# Altium PCB ECUs Simulator.PcbDoc
Units mil, origin at the board's own origin, x right, y up, seen from the top; angles counter-clockwise.
Board outline 2945 x 3010 mil, 2 copper layers (Top Layer, Bottom Layer), stack 12.8 mil thick; 61 components, 38 nets, 253 pads, 148 vias.
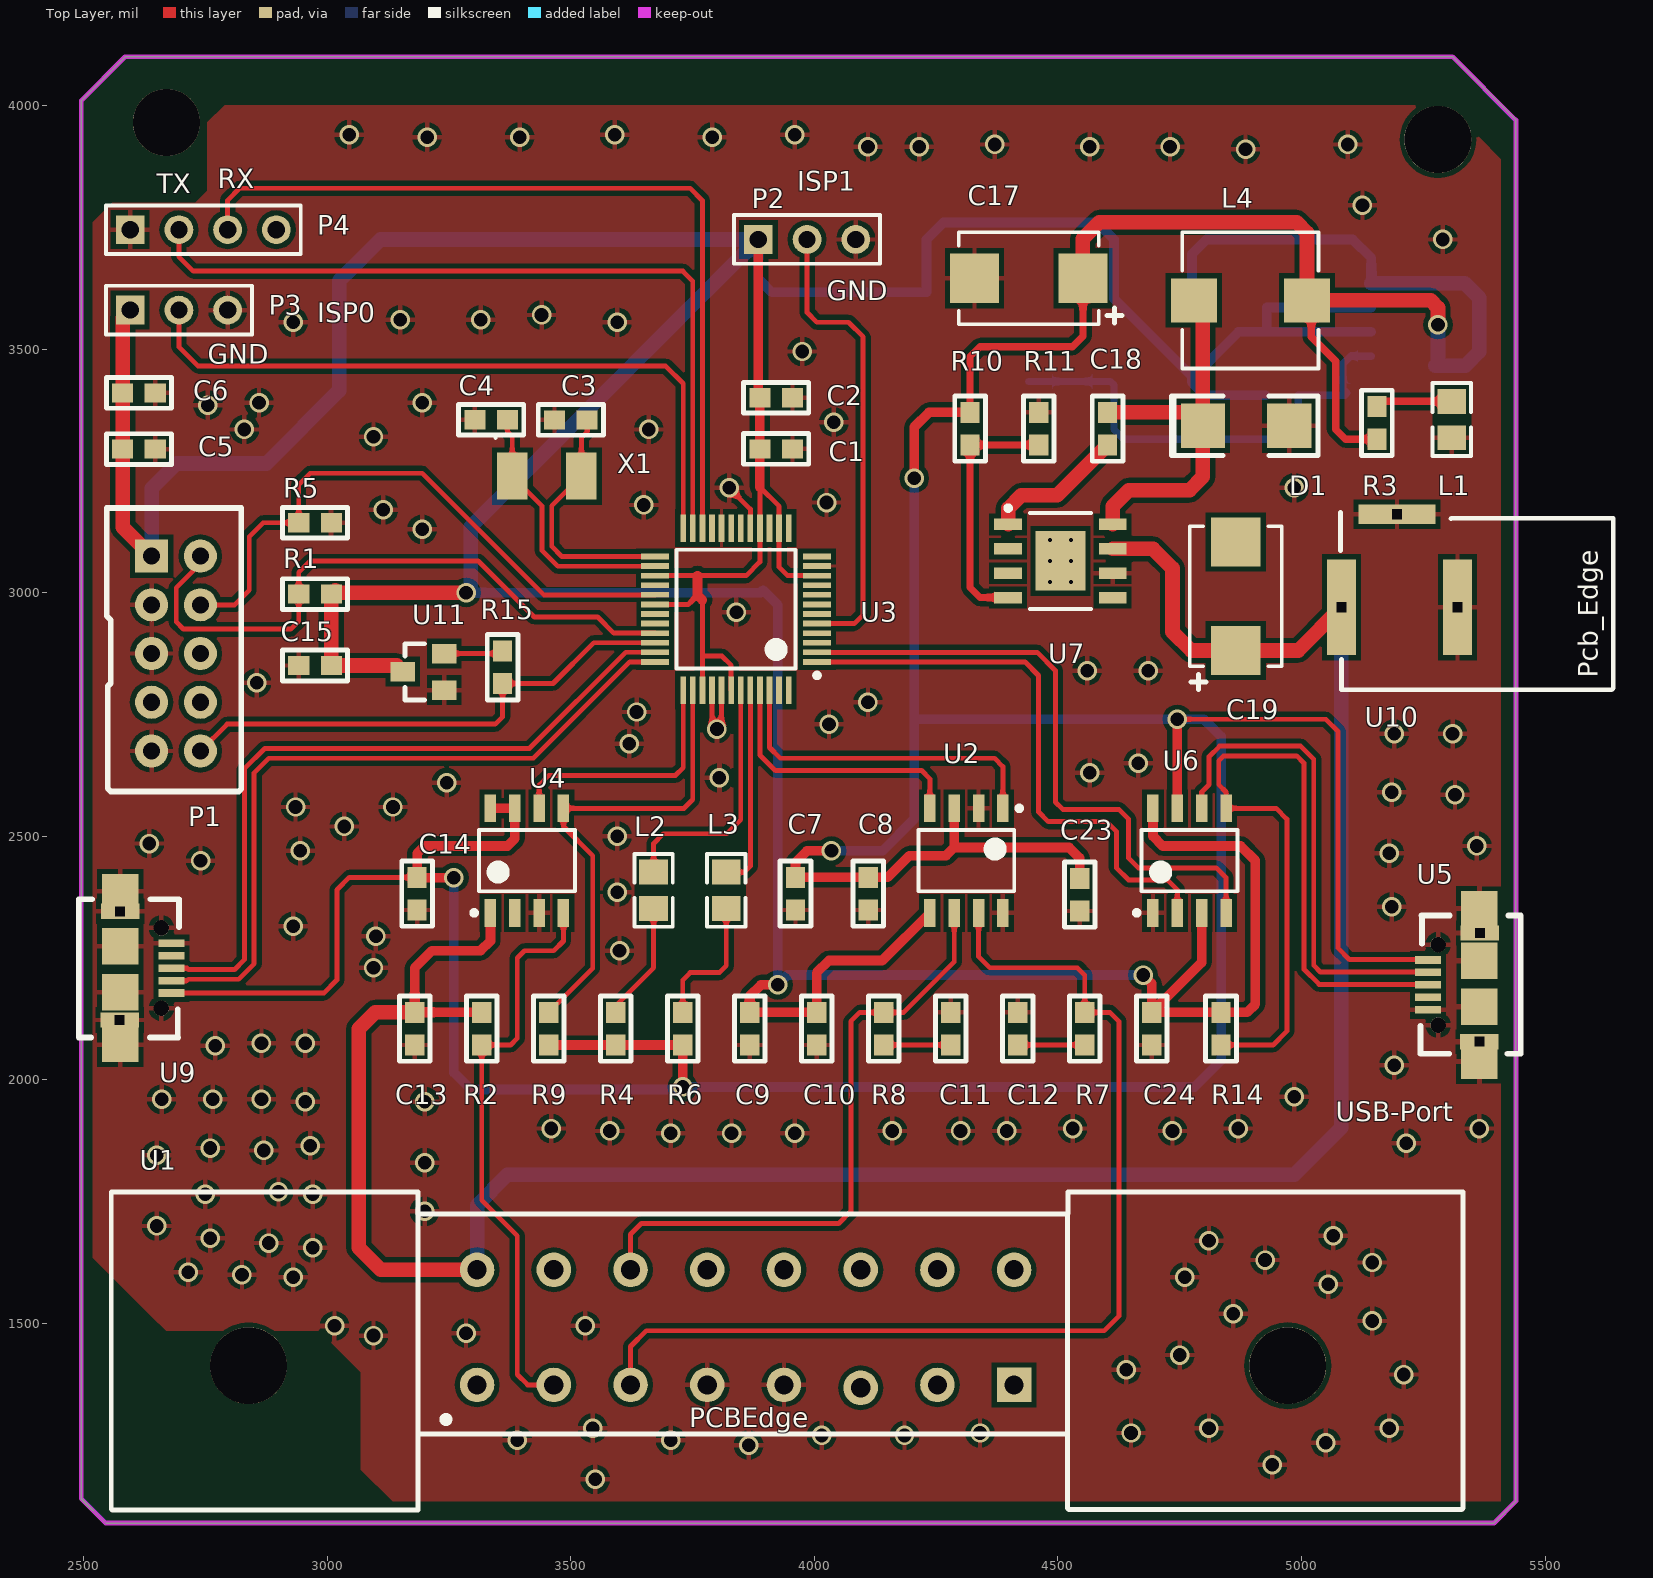
[diagram p0: Top Layer view]
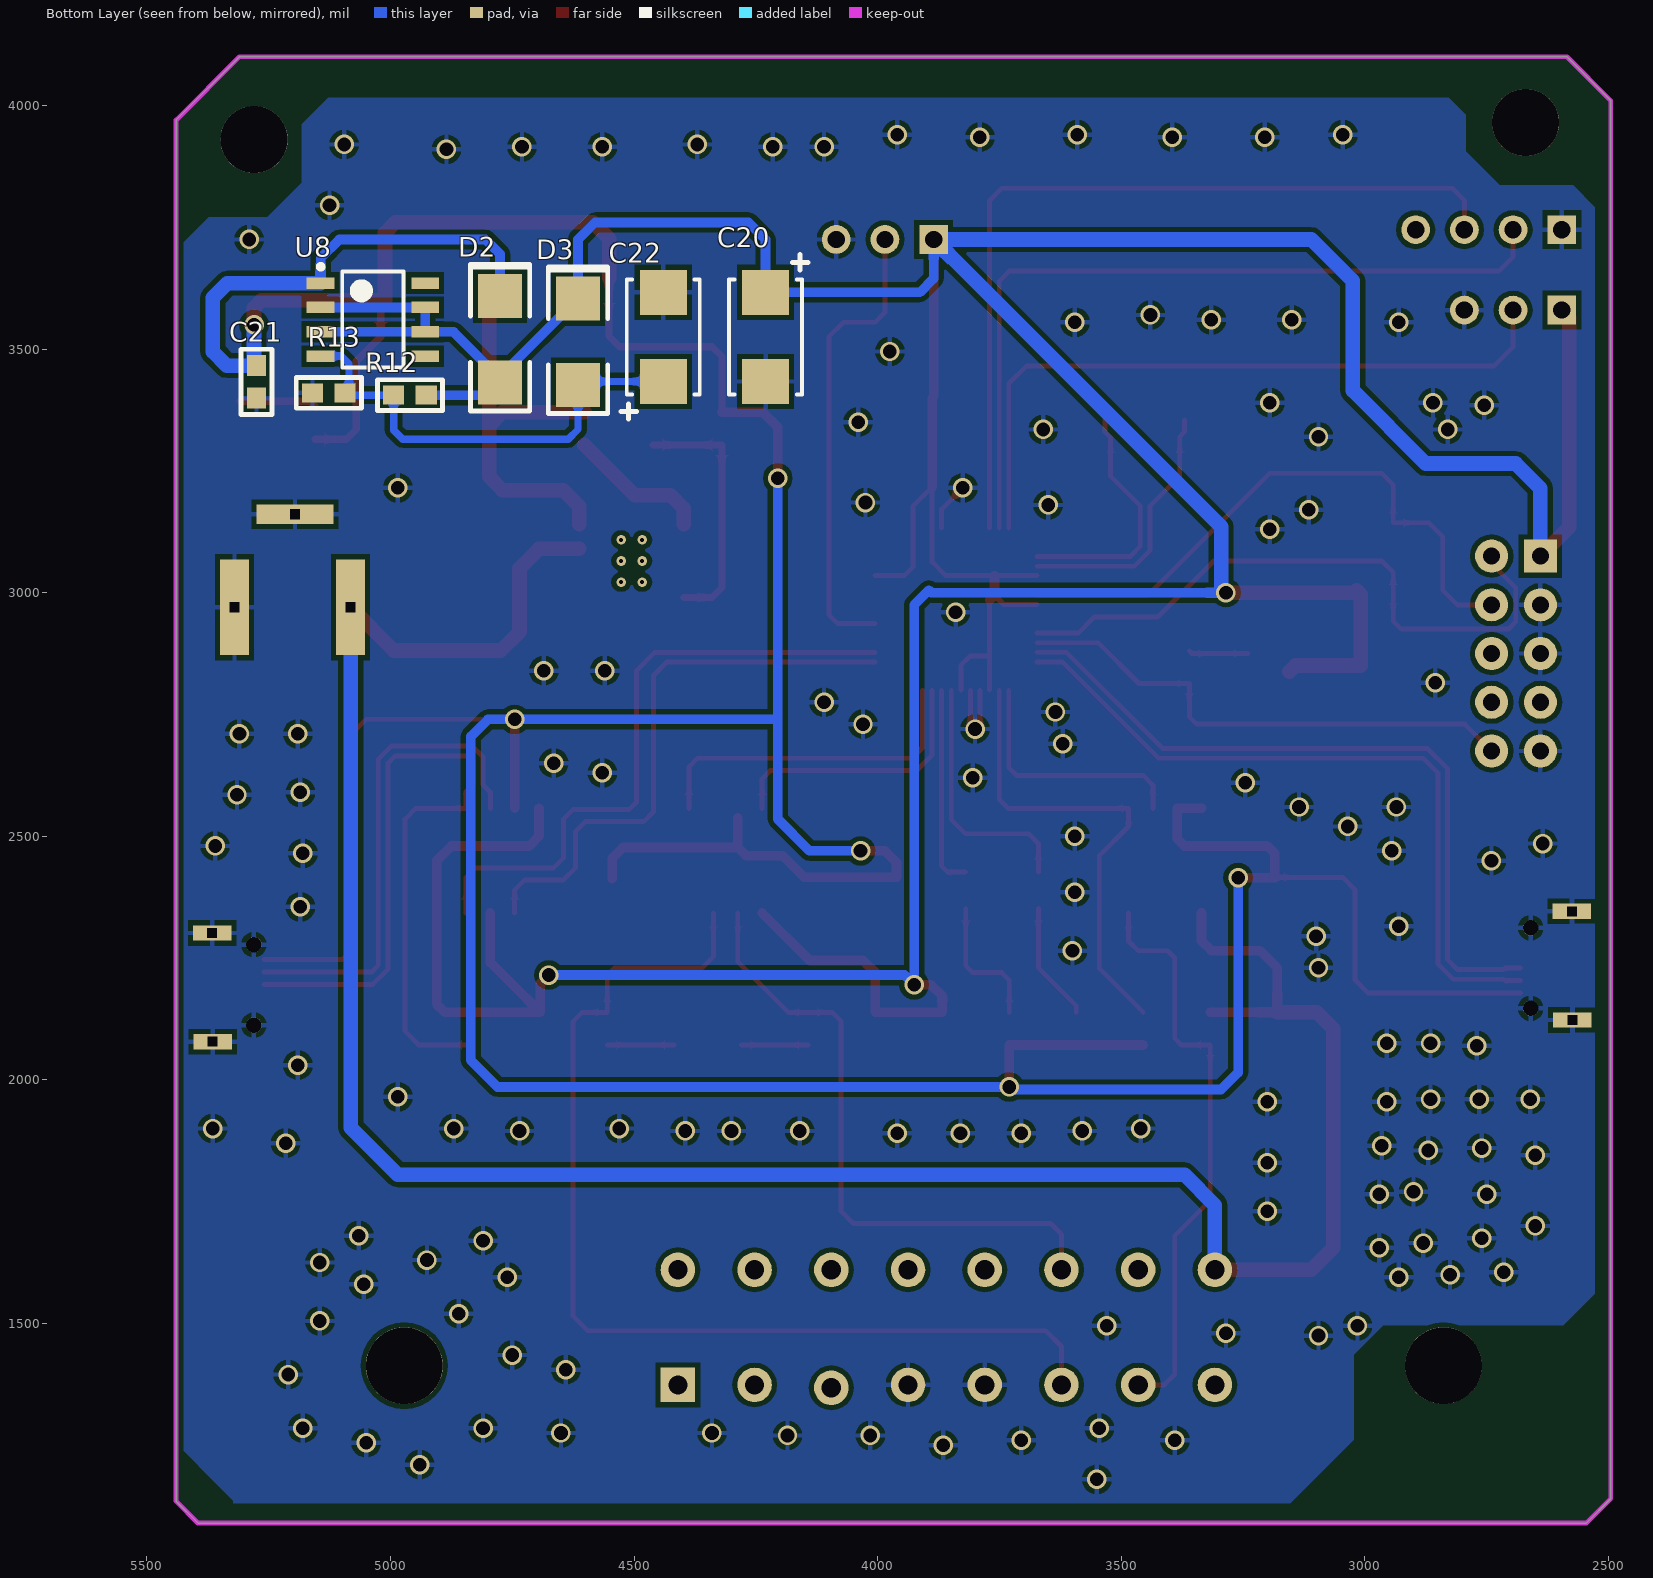
[diagram p1: Bottom Layer view, seen from below]

## Layer stack, top to bottom
Top Solder: solder mask 0.4, Solder Resist, Dk 3.5
Top Layer: signal copper 1.4
Dielectric 1: core 10, FR-4, Dk 4.2
Bottom Layer: signal copper 1.4
Bottom Solder: solder mask 0.4, Solder Resist, Dk 3.5

## Board outline
2495,1140 2495,4010 2585,4100 5310,4100 5440,3970 5440,1135 5395,1090 2545,1090

## Design rules (kind name [scope] priority, off if disabled: settings)
Clearance [All] p1: gap=7
DiffPairsRouting [All] p1: maxlimit=10 minlimit=10 mostfreqgap=10 toplayer_minwidth=10 toplayer_maxwidth=15 toplayer_prefwidth=15 bottomlayer_minwidth=10 bottomlayer_maxwidth=15 bottomlayer_prefwidth=15 maxuncoupledlength=500
PolygonConnect [All] p1: connectstyle=Relief reliefconductorwidth=10 reliefentries=4 polygonreliefangle="90 Angle" airgapwidth=10
RoutingVias [All] p1: holewidth=20 width=32 viastyle="Through Hole" minholewidth=15 minwidth=25 maxholewidth=28 maxwidth=40
SolderMaskExpansion [All] p1: expansion=4
Width [All] p1: maxlimit=30 minlimit=10 preferedwidth=10
29 further rules are at their usual default settings.

## Classes and differential pairs
component class Core: C1 C2 C3 C4 C5 C6 C7 C8 C9 C10 C11 C12 C13 C14 C15 L1 L2 L3 P1 P2 P3 P4 R1 R2 R3 R4 R5 R6 R7 R8 R9 R15 U1 U2 U3 U4 U11 X1
component class PL2303A: C23 C24 R14 U5 U6
component class Power: C17 C18 C19 C20 C21 C22 D1 D2 D3 L4 R10 R11 R12 R13 U7 U8 U10
component class USB: U9
differential pair NewDifferentialPair1: +NetU5_4 -NetR14_1
differential pair NewDifferentialPair2: +NetC4_1 -NetC3_1
differential pair NewDifferentialPair3: +D+ -D-

## Components (designator, comment, footprint, x,y, rotation, side; value= is the part's Value field where it differs from the comment)
C1 "10uF" 0603 3921.54,3295.39 r180 top
C2 "0.1uF" 0603 3921.54,3400.39 r180 top
C3 "22pF" 0603 3500,3355 r180 top
C4 "22pF" 0603 3336.54,3355.39 r180 top
C5 "4.7uF" 0603 2613.57,3295 r180 top
C6 "0.1uF" 0603 2613.57,3410.39 r180 top
C7 "0.1uF" 0603 3960.91,2382.1 r270 top
C8 "10uF" 0603 4110,2382.1 r270 top
C9 "10uF" 0603 3866.88,2105 r270 top
C10 "0.1uF" 0603 4004.41,2105 r270 top
C11 "560pF" 0603 4279.47,2105 r270 top
C12 "560pF" 0603 4417.01,2105 r270 top
C13 "0.1uF" 0603 3179.21,2105 r270 top
C14 "0.1uF" 0603 3185,2382.1 r90 top
C15 "0.1uF" 0603 2975,2850 r0 top
C17 "220uF" CAPM-7.0*4.5 4440,3645.32 r180 top
C18 "0.01uF" 0603 4602.18,3336.61 r90 top
C19 "10uF/16V" CAPM-7.0*4.5 4865,2992.46 r90 top
C20 "10uF/16V" CAPM-5.5*3.3 4230,3525 r270 bottom
C21 "0.1uF" 0603 5274.61,3432.62 r90 bottom
C22 "10uF/16V" CAPM-5.5*3.3 4440,3525 r90 bottom
C23 "10uF" 0603 4545,2380 r90 top
C24 "0.1uF" 0603 4692.86,2105 r90 top
D1 "B340A" DO214-AC 4886.16,3342.52 r180 top
D2 "1N4007" DO214-AC 4775,3520.2 r90 bottom
D3 "1N4007" DO214-AC 4615,3515 r90 bottom
L1 "LED" 0805 5308.41,3355.3 r270 top
L2 "LED" 0805 3670,2388.98 r90 top
L3 "LED" 0805 3819.09,2388.98 r90 top
L4 "4.7uH" 7*7*4-15uH 4895,3600.05 r0 top
P1 "Debug" JATG_10pin 2639.54,3075 r0 top
P2 "" HDR1X3 3885,3725 r0 top
P3 "" HDR1X3 2595.57,3580 r0 top
P4 "downloader" HDR1X4 2595.57,3745 r0 top
R1 "10K" 0603 2975,2997.3 r180 top
R2 "510R" 0603 3317.53,2105 r90 top
R3 "330R" 0603 5155,3348.43 r90 top
R4 "330R" 0603 3592.6,2105 r90 top
R5 "10K" 0603 2975,3143.8 r180 top
R6 "330R" 0603 3730.13,2105 r90 top
R7 "100R" 0603 4555.33,2105 r90 top
R8 "100R" 0603 4142.73,2105 r90 top
R9 "3.3K" 0603 3454.28,2105 r270 top
R10 "10K" 0603 4320,3336.61 r90 top
R11 "3.24K" 0603 4460.3,3336.61 r270 top
R12 "470R" 0603 4960,3405 r180 bottom
R13 "820R" 0603 5126.54,3409.61 r180 bottom
R14 "1.5K" 0603 4835,2105 r90 top
R15 "100K" 0603 3360.39,2846.93 r90 top
U1 "OBD-Connector" OBD-Female 3307.64,1373.78 r0 top
U2 "TJF1051T / 3" TJF1051 4305,2448 r270 top
U3 "LPC1549" LPC1549JBD48 3840,2970 r180 top
U4 "MC33660EFR2" SOP-8 3410,2450 r90 top
U5 "MicroUSB" Micro-USB 5365,2037.4 r180 top
U6 "PL2303SA" SOP-8 4770,2450 r90 top
U7 "TPS5430" TPS5430 4505,3065 r0 top
U8 "LM317L" LM317L 5035,3560.44 r180 bottom
U9 "MicroUSB" Micro-USB 2575,2386.69 r0 top
U10 "DC-12V-Conector" DC-12V-Con 5081.81,2800.71 r0 top
U11 "IMP809TEUR-T" SOT23-3 3155,2837.99 r90 top
X1 "12MHZ" 12Mhz-DFN 3450,3240 r180 top

## Footprints (in the part's own frame and the unit in brackets; to place one, negate y for a bottom-side part, rotate by r counter-clockwise, add the part's x,y. Pads: shape width x height; smd on the part's side, far side on the other; paste and mask are expansions set on the pad)
7*7*4-15uH [mm] "Precision Wire Wound Inductor, 2-Leads, Body 7.00x7.00mm, IPC Medium Density"
  rect 2.4x2.3 smd: 1(-2.95,0) 2(2.95,0)
  silkscreen extent -3.55,-3.55 3.55,3.55
12Mhz-DFN [mm]
  rect 1.6x2.45 smd: 1(1.78,0.025) 2(-1.82,0.025)
  silkscreen extent 2.6,-2.02 2.7,-1.92, body extent -2.65,-1.57 2.65,1.63, height 0.45
0603 [mm]
  rect 1.1x1 smd: 1(-0.85,0.01) 2(0.85,0.01)
  silkscreen extent -1.7,-0.79 1.7,0.81
0805 [mm]
  rect 1.3x1.5 smd: 1(-0.95,0) 2(0.95,0)
  silkscreen extent -1.9,-1 1.9,1
CAPM-5.5*3.3 [mm]
  rect 2.35x2.45 smd: 1(-2.325,0) 2(2.325,0)
  silkscreen extent -4.29,-1.9 3,2.2
CAPM-7.0*4.5 [mm] "Molded Capacitor, 2-Leads, Body 7.00x4.50mm, IPC Medium Density"
  rect 2.55x2.6 smd: 1(-2.825,0) 2(2.825,0)
  silkscreen extent -4.87,-2.4 3.65,2.4
DC-12V-Con [mm]
  rect 1.5x5 hole 0.5 square: 1(0,4.3) 2(6.05,4.3)
  rect 4x1 hole 0.5 square: 3(2.9,9.15)
  silkscreen extent -0.05,0 14.17,9.25
DO214-AC [mm]
  rect 2.3x2.3 smd: 1(-2.25,0) 2(2.25,0)
  silkscreen extent -3.75,-1.55 3.9,1.55
HDR1X3 [mm] "Connector; Header; 3 Position"
  rect 1.5x1.5 hole 0.9: 1(0,0)
  round 1.5 hole 0.9: 2(2.54,0) 3(5.08,0)
  silkscreen extent -1.27,-1.27 6.35,1.27
HDR1X4 [mm] "Connector; Header; 4 Position"
  rect 1.5x1.5 hole 0.9: 1(0,0)
  round 1.5 hole 0.9: 2(2.54,0) 3(5.08,0) 4(7.62,0)
  silkscreen extent -1.27,-1.27 8.89,1.27
JATG_10pin [mil]
  rect 68x68 hole 35: 1(0,0)
  round 68 hole 35: 2(100,0) 3(0,-100) 4(100,-100) 5(0,-200) 6(100,-200) 7(0,-300) 8(100,-300) 9(0,-400) 10(100,-400)
  silkscreen extent -92,-483 184,99
LM317L [mm]
  rect 1.45x0.6 smd: 1(-2.75,1.905) 2(-2.75,0.635) 3(-2.75,-0.635) 4(-2.75,-1.905) 5(2.7,-1.905) 6(2.7,-0.635) 7(2.7,0.635) 8(2.7,1.905)
  silkscreen extent -2.88,-2.5 1.57,2.88
LPC1549JBD48 [mm]
  rect 1.45x0.3 smd: 1(-4.2,2.852) 2(-4.2,2.352) 3(-4.2,1.852) 4(-4.2,1.352) 5(-4.2,0.852) 6(-4.2,0.352) 7(-4.2,-0.148) 8(-4.2,-0.648) 9(-4.2,-1.148) 10(-4.2,-1.648) 11(-4.2,-2.148) 12(-4.2,-2.648) 25(4.25,-2.648) 26(4.25,-2.148) 27(4.25,-1.648) 28(4.25,-1.148) 29(4.25,-0.648) 30(4.25,-0.148) 31(4.25,0.352) 32(4.25,0.852) 33(4.25,1.352) 34(4.25,1.852) 35(4.25,2.352) 36(4.25,2.852)
  rect 0.3x1.45 smd: 13(-2.725,-4.123) 14(-2.225,-4.123) 15(-1.725,-4.123) 16(-1.225,-4.123) 17(-0.725,-4.123) 18(-0.225,-4.123) 19(0.275,-4.123) 20(0.775,-4.123) 21(1.275,-4.123) 22(1.775,-4.123) 23(2.275,-4.123) 24(2.775,-4.123) 37(2.775,4.327) 38(2.275,4.327) 39(1.775,4.327) 40(1.275,4.327) 41(0.775,4.327) 42(0.275,4.327) 43(-0.225,4.327) 44(-0.725,4.327) 45(-1.225,4.327) 46(-1.725,4.327) 47(-2.225,4.327) 48(-2.725,4.327)
  silkscreen extent -4.32,-3 3.13,3.68
Micro-USB [mm]
  rect 2x0.8 hole 0.5 square: 1(-0.025,-6.706) 1(0,-1.041)
  rect 1.9x1.8 smd: 1(0,0) 1(0,-8)
  rect 1.9x1.9 smd: 1(0,-2.85) 1(0,-5.25)
  round 0.8 hole 0.8: 1(2.15,-1.9) 1(2.15,-6.1)
  rect 1.35x0.4 smd: 1(2.675,-2.7) 2(2.675,-3.35) 3(2.675,-4) 4(2.675,-4.65) 5(2.675,-5.3)
  silkscreen extent -2.16,-7.62 3.07,-0.41
OBD-Female [mm]
  rect 1.8x1.8 hole 1: 1(28,0)
  round 1.8 hole 1: 2(24,0) 3(20,-0.152) 4(16,0) 5(12,0) 6(8,0) 7(4,0) 8(0,0) 9(28,6) 10(24,6) 11(20,6) 12(16,6) 13(12,6) 14(8,6) 15(4,6) 16(0,6)
  round 4 hole 4: ""(-11.913,1) ""(42.266,1)
  silkscreen extent -19.08,-6.53 51.41,10.06
SOP-8 [mm]
  rect 1.45x0.6 smd: 1(-2.725,1.905) 2(-2.725,0.635) 3(-2.725,-0.635) 4(-2.725,-1.905) 5(2.725,-1.905) 6(2.725,-0.635) 7(2.725,0.635) 8(2.725,1.905)
  silkscreen extent -2.85,-2.5 1.6,2.88
SOT23-3 [mil]
  rect 40x50 smd: 1(-37.99,-85) 2(37.01,-85) 3(0.01,0)
  silkscreen extent -58,-45 57,-5
TJF1051 [mm]
  rect 1.45x0.6 smd: 1(-2.776,2.083) 2(-2.776,0.813) 3(-2.776,-0.457) 4(-2.776,-1.727) 5(2.674,-1.727) 6(2.674,-0.457) 7(2.674,0.813) 8(2.674,2.083)
  silkscreen extent -2.9,-2.32 1.55,3.06
TPS5430 [mm]
  rect 1.45x0.6 smd: 1(-2.725,1.905) 2(-2.725,0.635) 3(-2.725,-0.635) 4(-2.725,-1.905) 5(2.725,-1.905) 6(2.725,-0.635) 7(2.725,0.635) 8(2.725,1.905)
  rect 2.6x3.1 smd: 9(0,0)
  silkscreen extent -2.85,-2.5 1.6,2.88

## Part data
C1 C2 C3 C4 C5 C6 C7 C8 C9 C10 C11 C12 C13 C14 C15 C18 C21 C23 C24: library part Cap1, "ceramic"
C17 C19 C20 C22: library part Cap3, "aluminum"
D1: library part B340A-13-F
L4: library part Inductor
P1: library part JTAG_10Pin
P2 P3: library part "Header 3", "Header, 3-Pin"
P4: library part "Header 4", "Header, 4-Pin"
R1 R2 R3 R4 R5 R6 R7 R8 R9 R10 R11 R12 R13 R14 R15: library part Res
U1: library part OBD-MaleHead
U3: library part LPC1549JBD48
U5 U9: library part MicroUSB_B
U10: library part DC12V-Connector
X1: library part OSC

## Free pads (board coordinates)
  round 137.8 hole 137.8: 0(2670,3965) 1(5280,3930)

## Via types
v1: diameter 40, hole 28, Top Layer to Bottom Layer, 142 vias
v2: diameter 19.68, hole 7.87, Top Layer to Bottom Layer, 6 vias

## Nets (pads, with @x,y where several pads share a name; then routed paths per layer and width w, separated by ;. In a path a pad name is that pad's centre, name@x,y a point inside that pad or via, vN(x,y) a via of type N, cw(c..) or ccw(c..) an arc to the next point about the centre after c; other vN are vias at no path point)
3.3V: C1.2 C2.2 C5.2 C6.2 C9.1 C10.1 C15.2 C20.1 C24.2 D2.1 D3.2 P1.1 P2.1 P3.1 R1.1 R12.2 R14.2 U2.5 U3.10 U3.14 U3.16 U3.27 U3.30 U3.39 U3.42 U6.3 U6.8 U8.2 U8.3 U8.6 U8.7 U11.3 | length 11484.4
  Top Layer w10: U3.30 3740.84,2975.84 3760,2995 ; U3.27 3760,3034.9 3859.9,3034.9 3888.21,3063.21 U3.16 3888.21,3216.79 ; 3770,2985 3770,2870 3770.1,2870 ; U3.39 3770.1,2870 ; U3.42 3829.16,2850.84 3810,2870 3770.1,2870 ; 3888.07,3216.93 3888.21,3216.79 ; U3.10 3945,3034.9 3945,3035 3927.58,3052.42 U3.14 3927.58,3177.42 3888.21,3216.79
  Top Layer w20: 3760,3034.9 3760,2995 3770,2985 ; P2.1 3885,3403.07 C2.2 C1.2 3888.07,3216.93 ; v1(3925,2195) 3890,2195 3867.27,2172.27 C9.1 C10.1 4004.8,2219.8 4030,2245 4139.28,2245 U2.5 ; v1(4675,2215) 4692.47,2197.53 C24.2 ; U6.8 4695,2500 4715,2480 4875,2480 4905,2450 4905,2155 4888.46,2138.46 R14.2 C24.2 ; U6.3 4795,2241 C24.2
  Top Layer w30: P3.1 2580.1,3564.53 C6.2 C5.2 2580,3294.5 2580,3134.54 P1.1 ; U11.3 3142.61,2850.39 C15.2 R1.1 3016.56,3005 3021.56,3000 v1(3285,3000)
  Bottom Layer w20: v1(3285,3000) 3890,3000 3895,3005 3925,2975 v1(3925,2195) 3945,2215 v1(4675,2215) ; P2.1 3885,3645 3913.46,3616.54 C20.1 4230,3725 4265,3760 4580,3760 4615,3725 D3.2 4775,3443.58 D2.1@4775,3440 ; R12.2 4801.23,3405.39 D2.1 D2.1@4775,3440 ; U8.3 U8.6 ; U8.2 U8.7 U8.6 ; D2.1@4775,3440 4870.44,3535.44 U8.6
  Bottom Layer w30: P1.1 2639.54,3214.54 2690,3265 2875,3265 3025,3415 3025,3640 3110,3725 P2.1@3860,3725 ; v1(3285,3000) 3295,3010 3295,3135 P2.1
5V: C7.1 C8.1 C14.2 C17.1 C21.2 C23.2 D2.2 L4.2 R3.1 R4.1 R6.1 R9.2 R10.2 U2.3 U4.7 U4.8 U5.5 U6.7 U8.1 U9.5 | length 10915.2
  Top Layer w10: U9.5 2993.03,2178.03 3020,2205 3020,2390 3045.57,2415.57 C14.2 ; v1(4745,2740) 5050,2740 5075,2715 5075,2270 5098.03,2246.97 U5.5@5259.69,2246.97
  Top Layer w15: R10.2 4319.61,3484.61 4340,3505 4530,3505 4551.22,3526.22 C17.1 ; L4.2 5020,3591.19 5020,3525 5070,3475 5070,3335 5090.04,3314.96 R3.1
  Top Layer w20: v1(3260,2415) 3185.17,2415 C14.2 3184.61,2464.61 3200,2480 3370,2480 3385,2495 U4.7 U4.8 ; R9.2 R4.1 R6.1 v1(3729.74,1985.26) ; v1(4035,2470) 3985,2470 3961.3,2446.3 C7.1 C8.1 4150.57,2415.57 4195,2460 4270,2460 4287,2477 ; v1(4205,3235) 4205,3340 4235.08,3370.08 R10.2 ; U2.3@4287,2537.28 4287,2477 ; C23.2 4544.61,2455.39 4523,2477 4287,2477 ; U6.7 v1(4745,2740)
  Top Layer w30: C17.1 4551.22,3726.22 4585,3760 4990,3760 5011.14,3738.86 L4.2 5264.95,3600.05 5280,3585 v1(5280,3550)
  Bottom Layer w20: v1(3260,2415) 3260,2015 3295,1980 3724.47,1980 v1(3729.74,1985.26) 4780.26,1985.26 4835,2040 4835,2705 4800,2740 v1(4745,2740) 4205,2740 ; v1(4035,2470) 4140,2470 4205,2535 4205,2740 ; v1(4205,3235) 4205,2740 ; D2.2 4775,3695 4805,3725 5105,3725 5143.28,3686.72 U8.1
  Bottom Layer w30: U8.1 5334.56,3635.44 5365,3605 5365,3495 5336.09,3466.09 C21.2 5280,3471.09 v1(5280,3550)
12V: C13.1 C19.1 R2.2 U1.16 U4.1 U7.7 U10.1 | length 5014.3
  Top Layer w20: R2.2 C13.1 3179.61,2229.61 3215,2265 3315,2265 3335,2285 U4.1
  Top Layer w30: C13.1 3098.46,2138.46 3065,2105 3065,1655 3110,1610 U1.16 ; U7.7 4695,3090 4735,3050 4735,2920 4773.76,2881.24 C19.1 4993.05,2881.24 U10.1
  Bottom Layer w30: U1.16 3307.64,1742.64 3370,1805 4985,1805 5081.81,1901.81 U10.1
ADJ: C22.1 D3.1 R12.1 R13.2 U8.4 | length 965.2
  Bottom Layer w15: C22.1 4607.95,3433.46 D3.1 4615,3335 4635,3315 4975,3315 4993.46,3333.46 R12.1 5088.46,3405.39 R13.2 5085,3418.07 5085,3470 5100.44,3485.44 U8.4
BOOT: C18.1 U7.1 | length 290.8
  Top Layer w30: U7.1 4397.72,3172.72 4425,3200 4498.63,3200 C18.1
CAN_H: R7.2 U1.6 U2.7 | length 2189.7
  Top Layer w10: U1.6 3622.6,1452.6 3655,1485 4595,1485 4625,1515 4625,2120 4606.54,2138.46 R7.2 4554.93,2214.93 4539.87,2230 4360,2230 4337,2253 U2.7
CAN_L: R8.2 U1.14 U2.6 | length 1297.9
  Top Layer w10: U1.14 3622.6,1682.6 3645,1705 4050,1705 4075,1730 4075,2120 4093.46,2138.46 R8.2 4183.46,2138.46 4287,2242 U2.6
D+: U3.35 U9.3 | length 1492.8
  Top Layer w10: U9.3 2711.89,2229.21 2714.69,2226.42 2810,2226.42 2830,2246.42 2830,2638.28 2871.72,2680 3415,2680 3612.73,2877.73 U3.35@3672.66,2877.73
D-: U3.36 U9.4 | length 1492.8
  Top Layer w10: U9.4 2711.89,2203.62 2714.69,2206.42 2818.28,2206.42 2850,2238.13 2850,2630 2880,2660 3423.28,2660 3621.02,2857.73 U3.36
GND: C1.1 C2.1 C3.2 C4.2 C5.1 C6.1 C7.2 C8.2 C9.2 C10.2 C11.1 C12.1 C13.2 C14.1 C15.1 C17.2 C20.2 C21.1 C22.2 C23.1 C24.1 D1.1 L1.2 P1.3 P1.5 P1.9 P2.3 P3.3 P4.1 R5.1 R11.1 R13.1 U1.4 U1.5 U2.2 U2.8 U3.11 U3.17 U3.20 U3.40 U3.41 U4.3 U5.1 U6.1 U7.6 U9.1 U10.2 U10.3 U11.1 | length 268.2
  Top Layer w10: U3.40 3789.79,2730.21 v1(3800,2720) 3809.47,2729.47 U3.41 ; v1(3825,3215) 3868.53,3171.47 U3.17
  other v1: 3550,1180 4940,1210 3865,1250 5050,1255 3390,1260 3705,1260 4015,1270 4185,1270 4340,1275 4650,1275 3545,1285 4810,1285 5180,1285 5210,1395 4640,1405 4750,1435 3095,1475 3285,1480 3015,1495 3530,1495 5145,1505 4860,1520 5055,1580 2930,1595 4760,1595 2825,1600 2715,1605 5145,1625 4925,1630 2970,1655 2880,1665 4810,1670 2760,1675 5065,1680 2650,1700 3200,1730 2750,1765 2970,1765 2900,1770 3200,1830 2650,1845 2870,1855 2760,1860 2965,1865 5215,1870 3705,1890 3830,1890 3960,1890 3580,1895 4160,1895 4300,1895 4395,1895 4735,1895 3460,1900 4530,1900 4870,1900 5365,1900 2955,1955 3200,1955 2660,1960 2765,1960 2865,1960 4985,1965 5190,2030 2770,2070 2865,2075 2955,2075 3095,2230 3600,2265 3100,2295 2930,2315 5185,2355 3595,2385 2740,2450 5180,2465 2945,2470 5360,2480 2635,2485 3595,2500 3035,2520 2935,2560 3135,2560 5315,2585 5185,2590 3245,2610 3805,2620 4565,2630 4665,2650 3620,2690 5190,2710 5310,2710 4030,2730 3635,2755 4110,2775 2855,2815 4560,2840 4685,2840 3840,2960 3195,3130 3115,3170 3650,3180 4025,3185 4985,3215 3095,3320 2830,3335 3660,3335 4040,3350 2755,3385 2860,3390 3195,3390 3975,3495 2930,3555 3595,3555 3150,3560 3315,3560 3440,3570 5290,3725 5125,3795 4885,3910 4110,3915 4215,3915 4565,3915 4730,3915 4370,3920 5095,3920 3205,3935 3395,3935 3790,3935 3045,3940 3590,3940 3960,3940
ISP0: P2.2 U3.5 | length 958
  Top Layer w10: P2.2 3985,3575 4005,3555 4070,3555 4100,3525 4100,2955 4081.47,2936.47 U3.5
ISP1: P3.2 U3.24 | length 1438.8
  Top Layer w10: P3.2 2695.57,3504.43 2735,3465 3695,3465 3730.73,3429.27 U3.24
K-LINE: R2.1 U1.7 U4.4 | length 1201.3
  Top Layer w10: U1.7 3411.22,1373.78 3390,1395 3390,1680 3317.14,1752.86 R2.1 3376.54,2071.54 3390,2085 3390,2250 3405,2265 3465,2265 3485,2285 U4.4
NetC3_1: C3.1 U3.25 X1.2 | length 510.2
  Top Layer w10: C3.1 3533.46,3329.92 3521.65,3318.11 X1.2 3460.79,3178.13 3460.79,3095 3481.52,3074.27 U3.25
NetC4_1: C4.1 U3.26 X1.1 | length 542.9
  Top Layer w10: C4.1 3370,3330.32 3379.92,3320.39 X1.1 3440.79,3178.13 3440.79,3086.72 3473.24,3054.27 U3.26@3672.66,3054.27
NetC11_2: C11.2 R8.1 | length 137.5
  Top Layer w10: R8.1 C11.2
NetC12_2: C12.2 R7.1 | length 137.5
  Top Layer w10: C12.2 R7.1
NetC18_2: C18.2 D1.2 L4.1 U7.8 | length 825
  Top Layer w30: C18.2 4770.02,3370.08 D1.2 ; U7.8 4612.28,3177.28 4645,3210 4770,3210 4797.58,3237.58 D1.2 ; L4.1 4797.58,3581.33 D1.2
NetL1_1: L1.1 R3.2 | length 158.3
  Top Layer w15: R3.2 5165.42,3392.7 L1.1
NetL2_1: L2.1 R4.2 | length 245.3
  Top Layer w10: R4.2 3592.2,2152.2 3670,2230 L2.1
NetL3_1: L3.1 R6.2 | length 285.3
  Top Layer w10: R6.2 3729.74,2204.74 3745,2220 3805,2220 3819.09,2234.09 L3.1
NetR9_1: R9.1 U3.38 U4.5 | length 978.3
  Top Layer w10: R9.1 3545,2228.79 3545,2460 3485,2520 U4.5 3732.28,2557.28 3750.42,2575.42 U3.38
NetR14_1: R14.1 U5.3 U6.5 | length 1696.5
  Top Layer w10: R14.1 4941.54,2071.54 4970,2100 4970,2535 4947.72,2557.28 U6.5 4845,2590.83 4830,2605.83 4830,2655 4840,2665 4990,2665 5005,2650 5005,2226.72 5035.93,2195.79 U5.3@5259.69,2195.79
NetR15_2: R15.2 U11.2 | length 122.2
  Top Layer w10: U11.2 3354.61,2875 R15.2
NetU2_1: U2.1 U3.46 | length 698.6
  Top Layer w10: U3.46 3907.9,2682.1 3930,2660 4370,2660 4387,2643 U2.1
NetU2_4: U2.4 U3.45 | length 562.6
  Top Layer w10: U3.45 3888.21,2666.79 3920,2635 4220,2635 4237,2618 U2.4
NetU3_37: U3.37 U4.6 | length 517.2
  Top Layer w10: U4.6 3435,2605 3455,2625 3715,2625 3730.73,2640.73 U3.37
NetU5_4: U5.4 U6.6 | length 1010.9
  Top Layer w10: U6.6 4795,2590.83 4810,2605.83 4810,2663.28 4831.72,2685 4993.28,2685 4998.28,2685 5025,2658.28 5025,2235 5038.62,2221.38 U5.4@5259.69,2221.38
PIN_43: L2.2 U3.43 | length 523.5
  Top Layer w10: L2.2 3670,2485 3690,2505 3820,2505 3848.84,2533.84 U3.43
PIN_44: L3.2 U3.44 | length 415.6
  Top Layer w10: L3.2 3856.38,2426.38 3868.53,2438.53 U3.44
R\S\T\: P1.10 R15.1 U3.34 | length 1065.2
  Top Layer w10: P1.10 2794.54,2730 3345,2730 3360,2745 R15.1 3463.46,2813.46 3547.1,2897.1 U3.34
RX: P4.3 U3.22 | length 1728.2
  Top Layer w10: P4.3 2795.57,3805.57 2820,3830 3745,3830 3770.1,3804.9 U3.22
SWDCLK: P1.4 R5.2 U3.29 | length 1258.5
  Top Layer w10: P1.4 2810,2975 2840,3005 2840,3115 2868.41,3143.41 R5.2 2941.54,3221.54 2965,3245 3195,3245 3444.47,2995.53 U3.29
SWDIO: P1.2 R1.2 U3.33 | length 1322.4
  Top Layer w10: P1.2 2739.54,3059.54 2690,3010 2690,2940 2705,2925 2925,2925 2941.54,2941.54 R1.2 2941.54,3041.54 2965,3065 3310,3065 3425,2950 3555,2950 3588.21,2916.79 U3.33
TX: P4.2 U3.23 | length 1638.3
  Top Layer w10: P4.2 2695.57,3689.43 2725,3660 3730,3660 3750.42,3639.58 U3.23
UART_RX: U3.2 U6.4 | length 1308.5
  Top Layer w10: U3.2 4457.58,2877.42 4495,2840 4495,2570 4510,2555 4625,2555 4645,2535 4645,2455 4665,2435 4825,2435 4845,2415 U6.4
UART_TX: U3.1 U6.2 | length 1188.6
  Top Layer w10: U3.1 4432.27,2857.73 4460,2830 4460,2550 4480,2530 4600,2530 4620,2510 4620,2435 4644.74,2410.26 4724.74,2410.26 4745,2390 U6.2
VFB: R10.1 R11.2 U7.4 | length 520.4
  Top Layer w15: U7.4 4340,2990 4319.61,3010.39 R10.1 R11.2
pads on no net: C19.2 P1.6 P1.7 P1.8 P4.4 U1. U1.1 U1.2 U1.3 U1.8 U1.9 U1.10 U1.11 U1.12 U1.13 U1.15 U3.3 U3.4 U3.6 U3.7 U3.8 U3.9 U3.12 U3.13 U3.15 U3.18 U3.19 U3.21 U3.28 U3.31 U3.32 U3.47 U3.48 U4.2 U5.2 U7.2 U7.3 U7.5 U7.9 U8.5 U8.8 U9.2
copper on no net:
  other v2: 4483.35,3021.69 4526.65,3021.69 4483.35,3065 4526.65,3065 4483.35,3108.31 4526.65,3108.31

## Polygon pours and split planes (outlines as drawn)
GND on Top Layer "GND" (solid, remove dead copper, pour order 0): 3169.22,1135.08 5409.22,1135.08 5409.22,3890.08 5339.22,3960.08 5299.22,4000.08 5164.22,4000.08 2789.22,4000.08 2754.22,3965.08 2754.22,3850.08 2754.22,3825.08 2734.22,3805.08 2729.22,3800.08 2564.22,3800.08 2559.22,3800.08 2519.22,3760.08 2519.22,1650.08 2519.22,1635.08 2639.22,1515.08 2669.22,1485.08 2929.22,1485.08 2984.22,1485.08 3069.22,1400.08 3069.22,1210.08 3069.22,1200.08 3134.22,1135.08
GND on Bottom Layer "GND" (solid, remove dead copper, pour order 2): 3152.59,1131 3022.59,1261 3022.59,1356 3022.59,1436 2972.59,1486 2962.59,1496 2622.59,1496 2592.59,1496 2532.59,1556 2527.59,1561 2527.59,3781 2527.59,3791 2567.59,3831 2572.59,3836 2717.59,3836 2722.59,3836 2757.59,3871 2792.59,3906 2792.59,3976 2792.59,3981 2812.59,4001 2827.59,4016 4287.59,4016 5127.59,4016 5172.59,3971 5182.59,3961 5182.59,3841 5242.59,3781 5252.59,3771 5367.59,3771 5372.59,3771 5402.59,3741 5427.59,3716 5427.59,1316 5427.59,1241 5362.59,1176 5322.59,1136 5322.59,1131

## Keep-outs
Keep-Out Layer:
  lines w10: 2495,1140 2495,2010 2495,4010 2585,4100 5310,4100 5440,3970 5440,1135 5395,1090 2545,1090 2495,1140

## Silkscreen, mask and mechanical layers (free items; w line width, h text height)
Top Overlay:
  text "RX" at 2775,3830 h40
  text "ISP1" at 3965,3825 h40
  text "TX" at 2650,3820 h40
  text "GND" at 4025,3600 h40
  text "ISP0" at 2980,3555 h40
  text "GND" at 2755,3470 h40
  text "USB-Port" at 5070,1915 h40

## Dimensions
2495,4010 to 5440,3970 on Top Overlay
2585,4100 to 2545,1090 on Top Overlay

## Text inside footprints (layer, text, board x,y; h text height)
U1: Top Overlay "PCBEdge" at 3743.64,1286.78 h39.37
U10: Top Overlay "Pcb_Edge" at 5607.81,2825.71 h40 r90